# Altium PCB FMC-320U-B2.PcbDoc
Units mil, origin at the board's own origin, x right, y up, seen from the top; angles counter-clockwise.
Board outline 3385.65 x 3385.64 mil, 2 copper layers (Top Layer, Bottom Layer), stack 65.8 mil thick; 12 components, 27 nets, 98 pads, 24 vias.
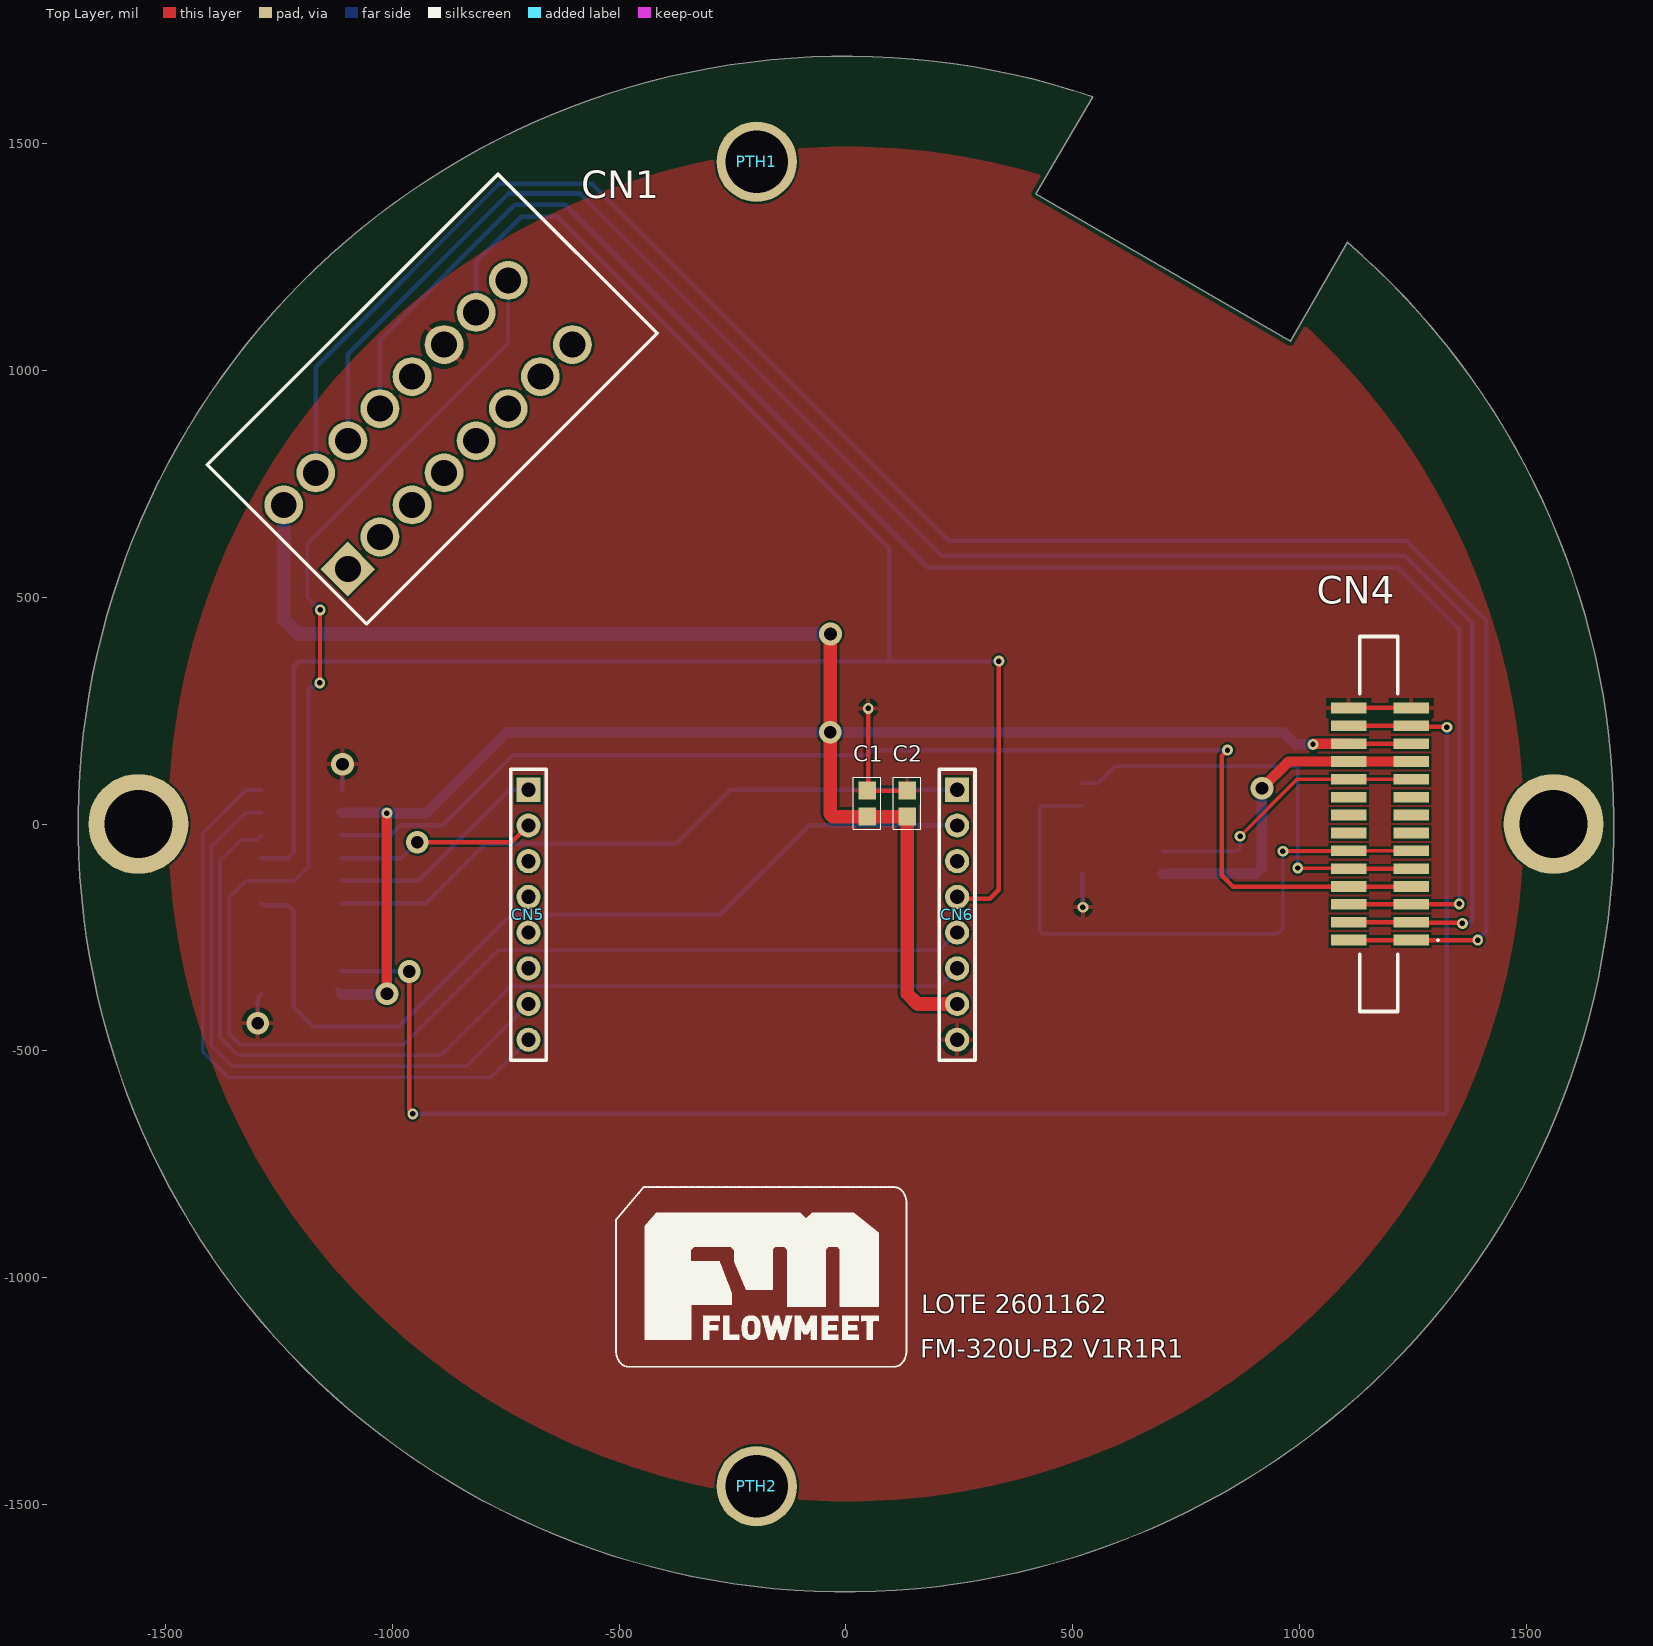
[diagram p0: Top Layer view]
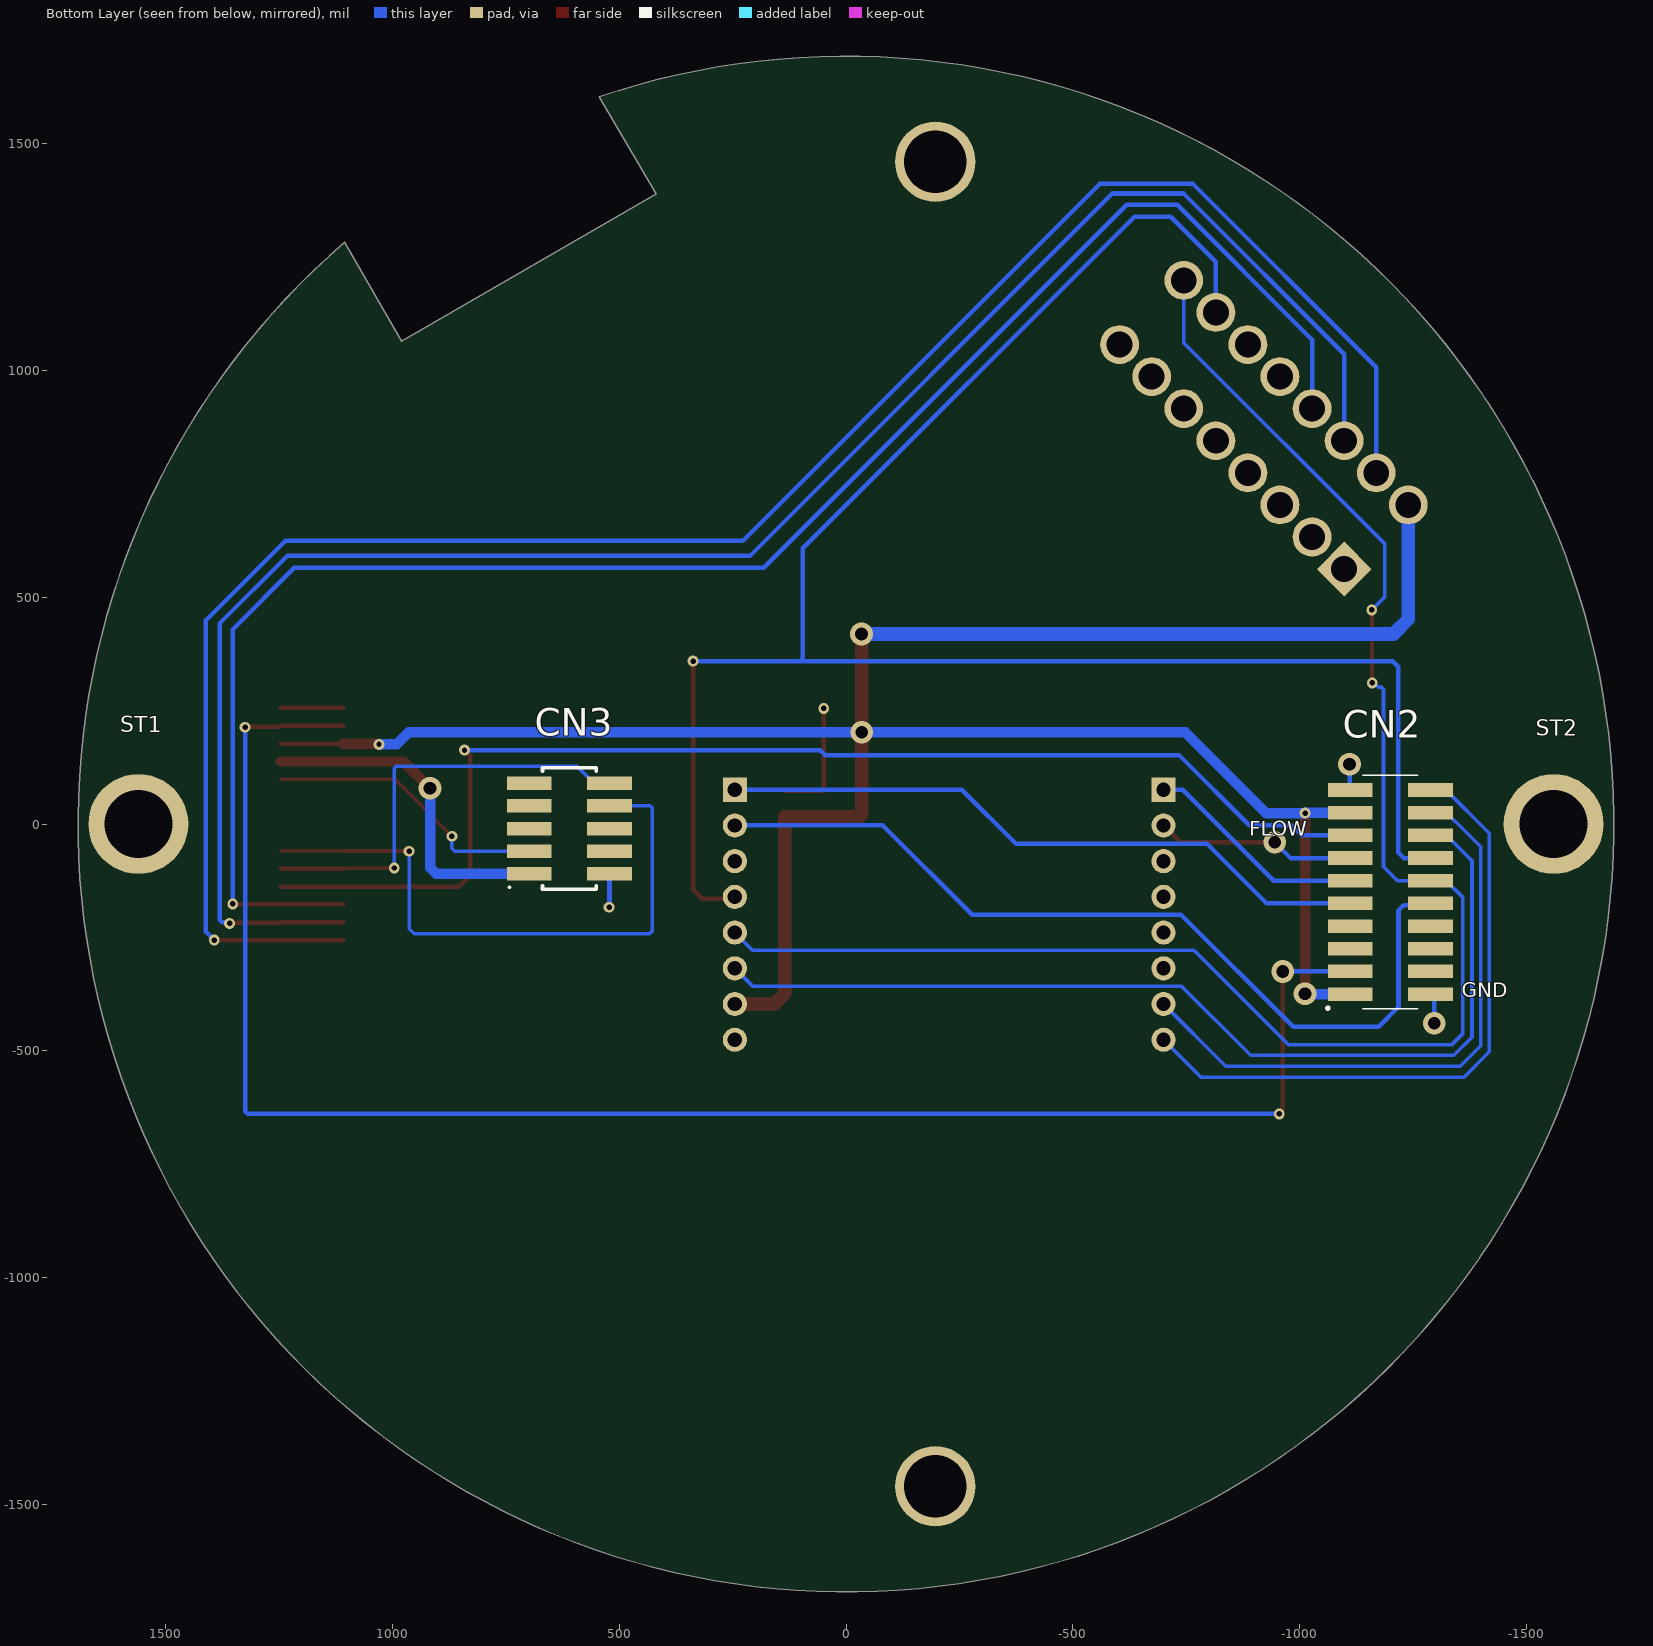
[diagram p1: Bottom Layer view, seen from below]

## Layer stack, top to bottom
Top Solder: solder mask 0.4, Solder Resist, Dk 3.5
Top Layer: signal copper 1.4
Dielectric 1: dielectric 63, FR-4, Dk 4.8
Bottom Layer: signal copper 1.4
Bottom Solder: solder mask 0.4, Solder Resist, Dk 3.5

## Board outline
544.09,1603.1 ccw(c0,0) 1105.3,1282.29 1105.42,1282.43 979.45,1063.97 418.28,1389.07

## Design rules (kind name [scope] priority, off if disabled: settings)
BoardOutlineClearance [All] p1: gap=10 ignorepadtopadclearanceinfootprint=FALSE except(0: Arc-SplitContinuation Track-SplitContinuation SMDPad-SplitContinuation THPad-SplitContinuation Via-SplitContinuation Fill-SplitContinuation Poly-SplitContinuation Region-SplitContinuation Text-SplitContinuation)
Clearance [All] p1: gap=5 ignorepadtopadclearanceinfootprint=FALSE
HoleSize [All] p1: absolutevalues=TRUE maxlimit=235 minlimit=6 maxpercent=80.000 minpercent=20.000
MinimumSolderMaskSliver [All] p1: minsoldermaskwidth=4
NetAntennae [All] p1: netantennaetolerance=1
PolygonConnect [All] p1: connectstyle=Relief reliefconductorwidth=10 reliefentries=4 polygonreliefangle="90 Angle" airgapwidth=10
RoutingVias [All] p1: holewidth=12 width=16 viastyle="Through Hole" minholewidth=28 minwidth=50 maxholewidth=12 maxwidth=24 useviatemplates=TRUE viatemplateguid#1={C7BDE58F-2F06-4AAB-BE6F-E03C132B40DF} viatemplateguid#2={A39A36EB-1F33-4919-9FEA-378448D0B3BD} viatemplatename#1=v61h30 viatemplatename#2=v127h71
SilkToSolderMaskClearance [IsPad] p1: minsilkscreentomaskgap=5 clearancetoexposedcopper=TRUE
SolderMaskExpansion [All] p1: expansion=2 istentingtop=FALSE
Width [All] p1: maxlimit=100 minlimit=5 preferedwidth=7
26 further rules are at their usual default settings.

## Components (designator, comment, footprint, x,y, rotation, side; value= is the part's Value field where it differs from the comment)
C1 "4.7uF" CAP_SM0603_YAGEOCC2_N 47,45 r90 top
C2 "100nF" CAP_SM0603_YAGEOCC2_N 135,45 r90 top
CN1 "DB141V-2.54-10P-GN" SHDR16W90P508X254_2X8_2282X1260X1375P -1098.13,562.03 r45 top locked
CN2 "DZ127S-22-20-55" DZ127S-22-20-55 -1200,-150 r270 bottom
CN3 "DZ127S-22-10-55" DZ127S-22-10-55 610,-10 r270 bottom
CN4 "F1003-V-14-25T-R" F1003-V-14-25T-R 1177.1,0 r90 top
CN5 "DW200R-11-08-43" DW200R-11-08-43 -700,-200 r270 top
CN6 "DW200R-11-08-43" DW200R-11-08-43 245,-200 r270 top
PTH1 "PTH-3MM-L" PTH_M3_L -197,1460 r0 top
PTH2 "PTH-3MM-L" PTH_M3_L -197,-1460 r0 top
ST1 "SMTSOM266BTR" SMTSOM230BTR 1560,0 r180 bottom
ST2 "SMTSOM266BTR" SMTSOM230BTR -1560,0 r180 bottom

## Footprints (in the part's own frame and the unit in brackets; to place one, negate y for a bottom-side part, rotate by r counter-clockwise, add the part's x,y. Pads: shape width x height; smd on the part's side, far side on the other; paste and mask are expansions set on the pad)
CAP_SM0603_YAGEOCC2_N [mm] "Capacitor, Yageo CC Class2, SM0603, IPC Medium Density"
  rect 1x1 smd: 1(-0.727,0) 2(0.727,0)
  silkscreen extent -1.45,-0.75 1.48,0.77, body extent -0.9,-0.5 0.9,0.5, height 0.9
DW200R-11-08-43 [mm]
  rect 1.35x1.35 hole 0.8: 1(-7,0)
  round 1.35 hole 0.8: 2(-5,0) 3(-3,0) 4(-1,0) 5(1,0) 6(3,0) 7(5,0) 8(7,0)
  silkscreen extent -8.15,-1 8.15,1, body extent -8.15,-1 8.15,1, height 6.35
DZ127S-22-10-55 [mm]
  rect 0.76x2.5 smd: 1(2.54,-2.25) 2(2.54,2.25) 3(1.27,-2.25) 4(1.27,2.25) 5(0,-2.25) 6(0,2.25) 7(-1.27,-2.25) 8(-1.27,2.25) 9(-2.54,-2.25) 10(-2.54,2.25)
  silkscreen extent -3.4,-3.4 3.4,1.5, body extent -3.33,-2.75 3.32,2.75, height 5.13
DZ127S-22-20-55 [mm]
  rect 0.76x2.5 smd: 1(5.715,-2.25) 2(5.715,2.25) 3(4.445,-2.25) 4(4.445,2.25) 5(3.175,-2.25) 6(3.175,2.25) 7(1.905,-2.25) 8(1.905,2.25) 9(0.635,-2.25) 10(0.635,2.25) 11(-0.635,-2.25) 12(-0.635,2.25) 13(-1.905,-2.25) 14(-1.905,2.25) 15(-3.175,-2.25) 16(-3.175,2.25) 17(-4.445,-2.25) 18(-4.445,2.25) 19(-5.715,-2.25) 20(-5.715,2.25)
  silkscreen extent -6.54,-3.55 6.55,1.53, body extent -6.35,-2.92 6.35,2.92, height 5.96
F1003-V-14-25T-R [mm]
  rect 0.6x2 smd: A1(-6.5,-1.75) A2(-5.5,-1.75) A3(-4.5,-1.75) A4(-3.5,-1.75) A5(-2.5,-1.75) A6(-1.5,-1.75) A7(-0.5,-1.75) A8(0.5,-1.75) A9(1.5,-1.75) A10(2.5,-1.75) A11(3.5,-1.75) A12(4.5,-1.75) A13(5.5,-1.75) A14(6.5,-1.75) B1(-6.5,1.75) B2(-5.5,1.75) B3(-4.5,1.75) B4(-3.5,1.75) B5(-2.5,1.75) B6(-1.5,1.75) B7(-0.5,1.75) B8(0.5,1.75) B9(1.5,1.75) B10(2.5,1.75) B11(3.5,1.75) B12(4.5,1.75) B13(5.5,1.75) B14(6.5,1.75)
  silkscreen extent -10.5,-3.3 10.5,1.12, body extent -10.5,-2.69 10.5,2.69, height 5.7
PTH_M3_L [mm]
  round 4.5 hole 3.5: 1(0,0)
SHDR16W90P508X254_2X8_2282X1260X1375P [mm]
  rect 2.175x2.175 / inner round 2.175 / far side rect 2.175x2.175 hole 1.45: 1(0,0)
  round 2.175 hole 1.45: 2(0,5.08) 3(2.54,0) 4(2.54,5.08) 5(5.08,0) 6(5.08,5.08) 7(7.62,0) 8(7.62,5.08) 9(10.16,0) 10(10.16,5.08) 11(12.7,0) 12(12.7,5.08) 13(15.24,0) 14(15.24,5.08) 15(17.78,0) 16(17.78,5.08)
  silkscreen extent -1.44,-2.91 21.58,9.69, body extent -0.95,-2.84 21.87,9.76, height 13.6
SMTSOM230BTR [mm]
  round 5.595 hole 3.81: MH1(0,0)
  body extent -2.17,-2.17 2.17,2.17, height 7

## Part data
C1: library part CC0603KRX5R6BB475, "CAP 4.7uF SM0603 X7R 16V YAGEO", Manufacturer=Yageo, Manufacturer part number=CC0603JRX7R7BB473, Package=0603, Tolerance=10, Category=Capacitor, ComponentLink1Description="Manufacturer Website", ComponentLink1URL=http://www.yageo.com
C2: library part CC0603KRX7R9BB104, "CAP 100nF SM0603 X7R 50V YAGEO CC2", Manufacturer=Yageo, Package=0603, Supplier Part Number 1=1362556, Tolerance (%)=10, Voltage Rating (Volts)=50, Category=Capacitor, ComponentLink1Description="Manufacturer Website", ComponentLink1URL=http://www.yageo.com, Datasheet=https://datasheet.lcsc.com/lcsc/2211101700_YAGEO-CC0603KRX7R9BB104_C14663.pdf, Manufacturer part number=CC0603KRX7R9BB104, Supplier 1=Farnell, Supplier 2=Digi-Key, Supplier Part Number 2=311-1344-1-ND
CN1: "PCB terminal block, nominal current: 6 A, rated voltage (III/2): 160 V, nominal cross section: 0.5 mm?, Number of potentials: 8, Number of rows: 1, Number of positions per row: 8, product range: FFKDS(A) 0,5/..-V, pitch: 2.54 mm, connection method: Push-in spring connection, mounting: Wave soldering, conductor/PCB connection direction: 90 ?, color: green, Pin layout: Linear double pinning, Solder pin [P]: 3.4 mm, type of packaging: packed in cardboard. The article can be aligned to create different nos. of", Manufacturer=Dorabo, Vendor Part Number=C2898752, Manufacturer part number=DB141V-2.54-10P-GN, Price=0.82, Vendor=LCSC
CN2: "Header Pin SMD 1.27mm 2x10", Manufacturer=Dealon, Manufacturer_Name=SAMTEC, Manufacturer_Part_Number=SFMC-110-02-L-D, Mouser Part Number=200-SFMC11002LD, Datasheet Link=http://suddendocs.samtec.com/prints/sfmc-1xx-xx-xx-d-xx-mkt.pdf
CN3: "Header PIN SMD 1.27mm 2x5", Manufacturer=Dealon, Manufacturer part number=DW127S-22-10-43
CN4: "14 Position FFC, FPC Connector Contacts, Vertical - 1 Sided 0.039\" (1.00mm) Surface Mount", Manufacturer=XFCN, Vendor Part Number=C2764805, Manufacturer part number=F1003-V-14-25T-R, Vendor=LCSC
CN5 CN6: "1 x 8 - tru hole 2mm - altura 4.3mm", Manufacturer=Dealon, Manufacturer part number=DW200R-11-08-43, Vendor=LCSC
PTH1 PTH2: "Montaje M3. algo de holgura y buena corona.", Temperature Max=-, Category="Mounting Hole", Temperature Min=-
ST1 ST2: "Standoffs & Spacers SURFACE MOUNT STANDOFF", Manufacturer=Yiyuan, Manufacturer part number=SMTSOM266BTR, Price=C49236522, Vendor=LCSC

## Via types
v1: diameter 24, hole 12, Top Layer to Bottom Layer, 16 vias
v2: diameter 50, hole 28, Top Layer to Bottom Layer, 8 vias

## Nets (pads, with @x,y where several pads share a name; then routed paths per layer and width w, separated by ;. In a path a pad name is that pad's centre, name@x,y a point inside that pad or via, vN(x,y) a via of type N, cw(c..) or ccw(c..) an arc to the next point about the centre after c; other vN are vias at no path point)
AVDD: CN3.1 CN4.A11 CN4.B11 | length 752.9
  Top Layer w23: v2(917,79) 975.8,137.8 CN4.A11
  Bottom Layer w23: CN3.1 903.53,-110 917,-96.53 v2(917,79)
DVDD: C1.1 C2.1 CN1.2 CN2.1 CN2.17 CN4.A12 CN4.B12 CN6.7 | length 5501.8
  Top Layer w10: CN4.B12 CN4.A12
  Top Layer w23: v2(-1012,-374) v1(-1012,24) ; v1(1029.46,175.68) 1029.74,175.68 1031.22,177.17 CN4.B12
  Top Layer w30: v2(-34,419) -35,418 v2(-35,202) -35,22.24 -29.14,16.38 C1.1 C2.1 135,-374 157.85,-396.85 CN6.7
  Bottom Layer w15: CN2.1@-1118.88,-367.54 CN2.1 ; v2@-1013,-375 v2(-1012,-374)
  Bottom Layer w23: CN2.1 v2@-1013,-375 ; CN2.17 -1013.27,25 -1012.27,24 -926,24 -748,202 v2(-35,202) 964,202 990.32,175.68 v1(1029.46,175.68)
  Bottom Layer w30: CN1.2 -1239.55,451.55 -1207,419 v2(-34,419)
FLOW_CMP_OUT: CN2.15 CN4.A4 CN4.B4 | length 2739.9
  Top Layer w10: v1(841,163) 828,150 828,-112.94 852.86,-137.8 CN4.B4 CN4.A4
  Bottom Layer w10: CN2.15 -1004,-25 -982,-3 -889.21,-3 -734.21,152 46,152 57,163 v1(841,163)
FLOW_DETECTOR: CN3.10 CN4.A5 CN4.B5 | length 961.8
  Top Layer w8: v1(996,-97) 996.71,-97.71 1107.49,-97.71 CN4.B5
  Top Layer w10: CN4.B5 CN4.A5
  Bottom Layer w8: CN3.10 555.67,90 592.67,127 991.31,127 996,122.31 v1(996,-97)
FLOW_SENSOR_X1: CN1.4 CN4.A1 CN4.B1 | length 4375.6
  Top Layer w10: CN4.B1 CN4.A1 v1(1392.72,-255.91)
  Bottom Layer w10: CN1.4 -1168.84,1007.16 -765,1411 -559,1411 228,624 1236,624 1411,449 1411,-237.63 v1(1392.72,-255.91)
FLOW_SENSOR_X2: CN1.6 CN4.A2 CN4.B2 | length 4139.4
  Top Layer w10: CN4.B2 CN4.A2 1247.23,-217.77 1357.77,-217.77 v1(1359,-219)
  Bottom Layer w10: CN1.6 -1098.13,1035.87 -744,1390 -587.21,1390 211.79,591 1232,591 1381,442 1381,-210.68 1375.14,-216.54 1361.46,-216.54 v1(1359,-219)
FLOW_SENSOR_X3: CN1.8 CN4.A3 CN4.B3 | length 3891.8
  Top Layer w10: CN4.B3 CN4.A3 1246.58,-176.58 1351.42,-176.58 v1(1352,-176)
  Bottom Layer w10: CN1.8 -1027.42,1067.58 -730,1365 -619,1365 181,565 1216,565 1352.26,428.74 1352.26,-175.74 v1(1352,-176)
FLUID_TEMP_AN: CN3.8 CN4.A6 CN4.B6 | length 1365.1
  Top Layer w8: v1(963,-60) 963.47,-59.53 1107.73,-59.53 CN4.B6 CN4.A6
  Bottom Layer w8: CN3.8 431.69,40 427,35.31 427,-236 433,-242 952,-242 963,-231 v1(963,-60)
GND: C1.2 C2.2 CN1.12 CN2.2 CN2.19 CN3.2 CN4.A14 CN4.B14 CN6.8 | length 606.8
  Top Layer w10: v1(49,255) 49,75.62 C1.2 C2.2 ; CN4.B14 CN4.A14
  Bottom Layer w10: v2(-1297,-439) -1297,-383.42 CN2.2 ; CN2.19 -1110,76.42 v2(-1110,132) ; CN3.2 521.42,-182.61 v1(522.23,-183.43)
PA0_RSVD: CN2.10 CN6.2 | length 1955
  Bottom Layer w10: CN2.10 -1284.68,-178.91 -1230.23,-178.91 -1229.13,-180 -1228,-180 -1218,-190 -1218,-403.22 -1174.22,-447 -985.62,-447 -738.62,-200 -278,-200 -81.15,-3.15 CN6.2
PA2_USART2_RSVD: CN2.8
PA3_USART2_RSVD: CN2.6
PB10_RSVD: CN3.5
PB11_RSVD: CN3.9
PC2_AN_RSVD: CN3.6
PC3_AN_RSVD: CN3.4
PC9_RSRVD: CN2.18 CN5.7 | length 1354.9
  Bottom Layer w8: CN2.18 -1322.83,25 -1342.87,4.96 -1344.01,4.96 -1399,-50.03 -1399,-489 -1354,-534 -837.15,-534 CN5.7
PD7_RSVD: CN2.7
RADIO_ENABLE: CN2.16 CN6.6 | length 2224.6
  Bottom Layer w8: CN2.16 -1298.54,-34.96 -1333.93,-34.96 -1380,-81.03 -1380,-470 -1340,-510 -892,-510 -740,-358 205.11,-358 CN6.6
RADIO_PWR_ON: CN2.20 CN5.8 | length 1426.1
  Bottom Layer w8: CN2.20 -1322.83,75 -1418,-20.17 -1418,-502.14 -1362.14,-558 -782.41,-558 CN5.8
RADIO_UART_RX: CN1.16 CN2.12 CN6.5 | length 3726
  Top Layer w8: v1(-1160,311) -1159.5,311.5 -1159.5,471.5 v1(-1159,472)
  Bottom Layer w8: v1(-1160,311) -1164.33,311 -1173.27,302.06 -1179.34,302.06 -1185,296.4 -1185,-94 -1216,-125 CN2.12 -1322.83,-125 -1360,-162.17 -1360,-462 -1335,-487 -976,-487 -767,-278 206.37,-278 CN6.5 ; v1(-1159,472) -1188,501 -1188,617.16 -744.58,1060.58 CN1.16
RADIO_UART_TX: CN1.14 CN2.14 CN6.4 | length 4269
  Top Layer w10: CN6.4 249.37,-165 317.14,-165 337,-145.14 v1(337,359)
  Bottom Layer w10: CN2.14 -1229.8,-75 -1217.72,-62.92 -1217.72,346.92 -1205.64,359 100.5,359 ; CN1.14 -815.29,1239.71 -716.05,1338.95 -635.95,1338.95 95,608 95,364.5 100.5,359 ; v1(337,359) 100.5,359
SPI3_MISO: CN2.11 CN5.1 | length 494.5
  Bottom Layer w10: CN2.11 -943,-125 -742.41,75.59 CN5.1
SPI3_MOSI: CN2.9 CN6.1 | length 1460.2
  Bottom Layer w10: CN2.9 -927,-175 -796,-44 -375,-44 -255.41,75.59 CN6.1
SPI3_SCK: CN2.13 CN5.2 | length 441.2
  Top Layer w10: v2(-945,-40) -737.25,-40 -700.4,-3.15 CN5.2
  Bottom Layer w10: CN2.13 -980,-75 v2(-945,-40)
VDD: CN2.3 CN4.A13 CN4.B13 | length 3812.2
  Top Layer w10: v2(-963,-325) -963,-631 v1(-955,-639) ; CN4.B13 CN4.A13 1247.65,214.89 1323.1,214.89 v1(1324.74,213.25)
  Bottom Layer w10: CN2.3 v2(-963,-325) ; v1(-955,-639) 1318.88,-639 1324.74,-633.14 v1(1324.74,213.25)
VREF+: CN3.3 CN4.A10 CN4.B10 | length 628.5
  Top Layer w8: v1(869,-27) 994.43,98.43 CN4.B10 CN4.A10
  Bottom Layer w8: CN3.3 862.31,-60 869,-53.31 v1(869,-27)
pads on no net: CN1.1 CN1.3 CN1.5 CN1.7 CN1.9 CN1.10 CN1.11 CN1.13 CN1.15 CN2.4 CN2.5 CN3.7 CN4.A7 CN4.A8 CN4.A9 CN4.B7 CN4.B8 CN4.B9 CN5.3 CN5.4 CN5.5 CN5.6 CN6.3 PTH1.1 PTH2.1 ST1.MH1 ST2.MH1

## Polygon pours and split planes (outlines as drawn)
GND on Top Layer "GND_L01_P001" (solid, pour order 1): -1493.43,0 ccw(c0,0) 0,-1493.43 ccw(c0,0) 1493.43,0 ccw(c0,0) 0,1493.43 ccw(c0,0)

## Silkscreen, mask and mechanical layers (free items; w line width, h text height)
Top Overlay:
  drawing of 10 lines, arcs and shapes, not listed
  text "LOTE 2601162" at 166,-1093.22 h70
  text "FM-320U-B2 V1R1R1" at 164,-1191.22 h70
Bottom Overlay:
  text "FLOW" at -889,-37.39 h55
  text "GND" at -1357,-393.39 h55
Mechanical 13:
  lines w10: 544.09,1603.1 ccw(c0,0) 1105.3,1282.29 ; 544.3,1603.45 418.28,1389.07 979.45,1063.97 1105.42,1282.43